# Altium PCB PCB1.PcbDoc
Units mm, origin at the board's own origin, x right, y up, seen from the top; angles counter-clockwise.
Board outline 152.4 x 101.6 mm, 2 copper layers (Top Layer, Bottom Layer); 4 components, 3 nets, 12 pads, 0 vias.
Unrouted connection lines stored in the file: 7.
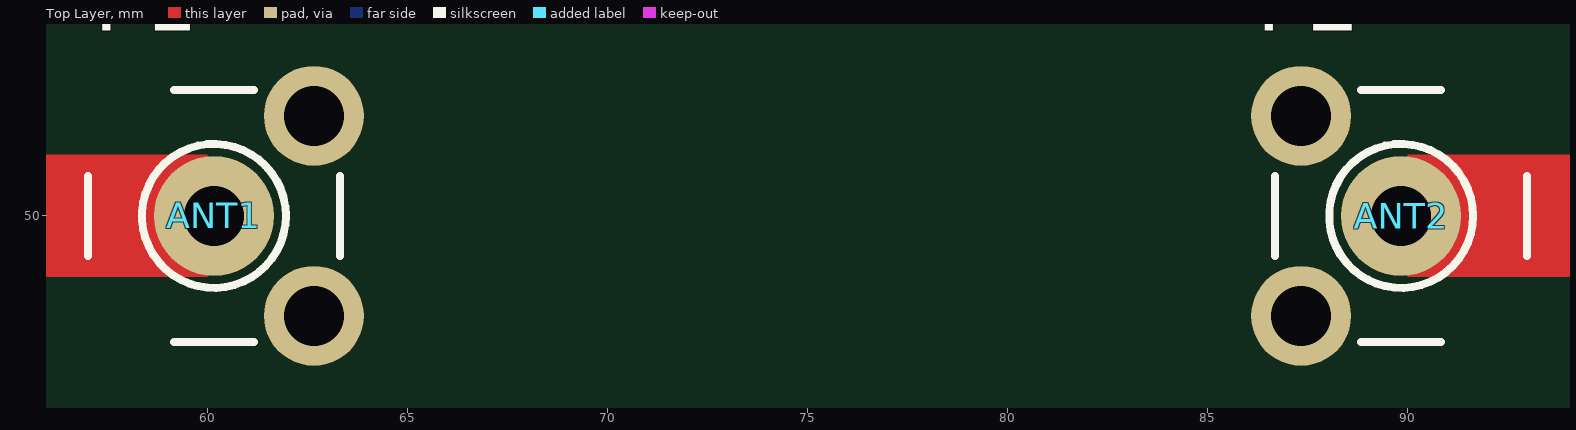
[diagram p0: Top Layer view]
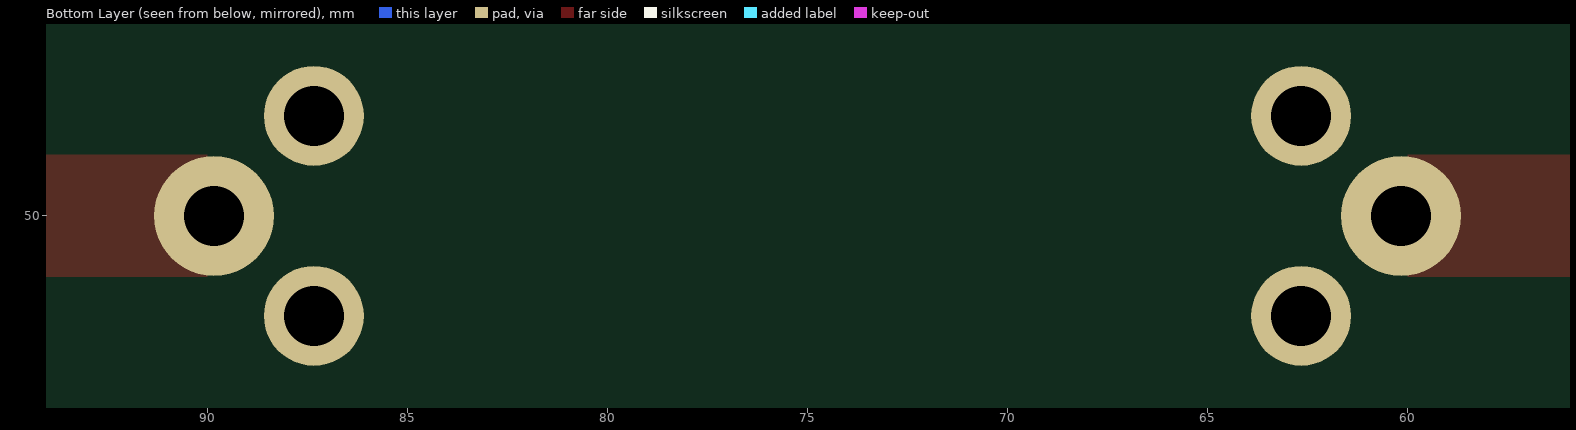
[diagram p1: Bottom Layer view, seen from below]

## Layer stack, top to bottom
Top Layer: signal copper 0.0356
Dielectric: dielectric 0.32, FR-4, Dk 4.8
Bottom Layer: signal copper 0.0356

## Board outline
0,0 152.4,0 152.4,101.6 0,101.6

## Design rules (kind name [scope] priority, off if disabled: settings)
Clearance [All] p1: gap=0.254
PolygonConnect [All] p1: connectstyle=Relief reliefconductorwidth=0.254 reliefentries=4 polygonreliefangle="90 Angle"
RoutingVias [All] p1: holewidth=0.711 width=1.27 viastyle="Through Hole" minholewidth=0.711 minwidth=1.27 maxholewidth=0.711 maxwidth=1.27
SilkscreenOverComponentPads [All] p1: minsilkscreentomaskgap=0.254
SolderMaskExpansion [All] p1: expansion=0.102
Width [All] p1: maxlimit=0.254 minlimit=0.254 preferedwidth=0.254
27 further rules are at their usual default settings.

## Components (designator, comment, footprint, x,y, rotation, side; value= is the part's Value field where it differs from the comment)
ANT1 "ANT868MFR4" ANT2G4FR4 50,50 r180 top
ANT2 "ANT868MFR4" ANT2G4FR4 100,50 r0 top
P1 "SMB" SMB_V-RJ45 60.16,50 r90 top
P2 "SMB" SMB_V-RJ45 89.84,50 r270 top

## Footprints (in the part's own frame and the unit in brackets; to place one, negate y for a bottom-side part, rotate by r counter-clockwise, add the part's x,y. Pads: shape width x height; smd on the part's side, far side on the other; paste and mask are expansions set on the pad)
ANT2G4FR4 [mm]
  round 3 hole 1: 0(-10.16,0)
  Top Layer region: 0,-19.12 11.12,-19.12 11.12,-1.81 0,-1.81
  Top Layer region: 0,1.81 11.12,1.81 11.12,19.12 0,19.12
  Top Layer region: -10,-1.53 11.12,-1.53 11.12,1.53 -10,1.53
  Top Layer region: 11.12,-19.125 29.02,-19.125 29.02,19.115 11.12,19.115
SMB_V-RJ45 [mm] "Connector; SMB Straight"
  round 2.5 hole 1.5: 1(0,0) 2(-2.5,-2.5) 2(2.5,-2.5)
  round 0 all layers, no hole: 2(-2.5,2.5) 2(2.5,2.5)
  silkscreen extent -3.15,-3.15 3.15,3.15

## Part data
P1 P2: "SMB Straight Connector"

## Nets (pads, with @x,y where several pads share a name; then routed paths per layer and width w, separated by ;. In a path a pad name is that pad's centre, name@x,y a point inside that pad or via, vN(x,y) a via of type N, cw(c..) or ccw(c..) an arc to the next point about the centre after c; other vN are vias at no path point)
GND: P1.2 P2.2
NetANT1_0: ANT1.0 P1.1
NetANT2_0: ANT2.0 P2.1